# Altium PCB Inverter_Power.PcbDoc
Units mil, origin at the board's own origin, x right, y up, seen from the top; angles counter-clockwise.
Board outline 7086.61 x 5905.51 mil, 4 copper layers (Top Layer 1, Top Layer, Bottom Layer, Bottom Layer 1), stack 62.205 mil thick; 46 components, 44 nets, 337 pads, 0 vias.
Unrouted connection lines stored in the file: 185.
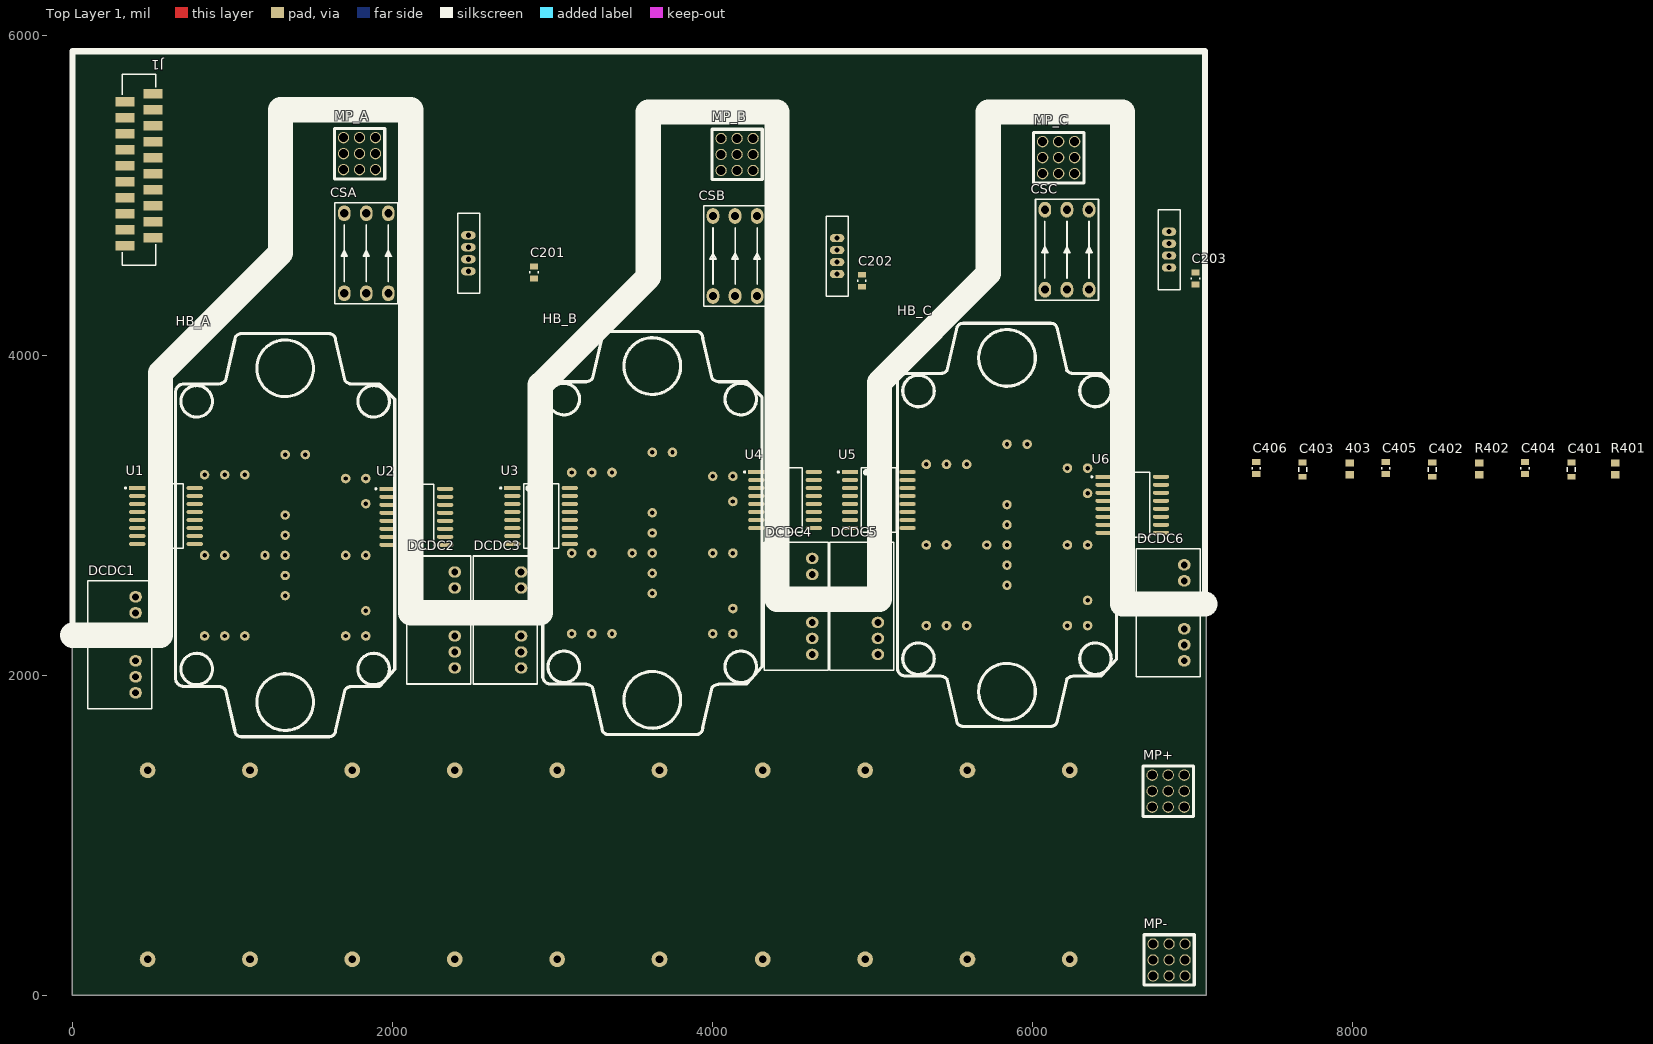
[diagram p0: Top Layer 1 view]
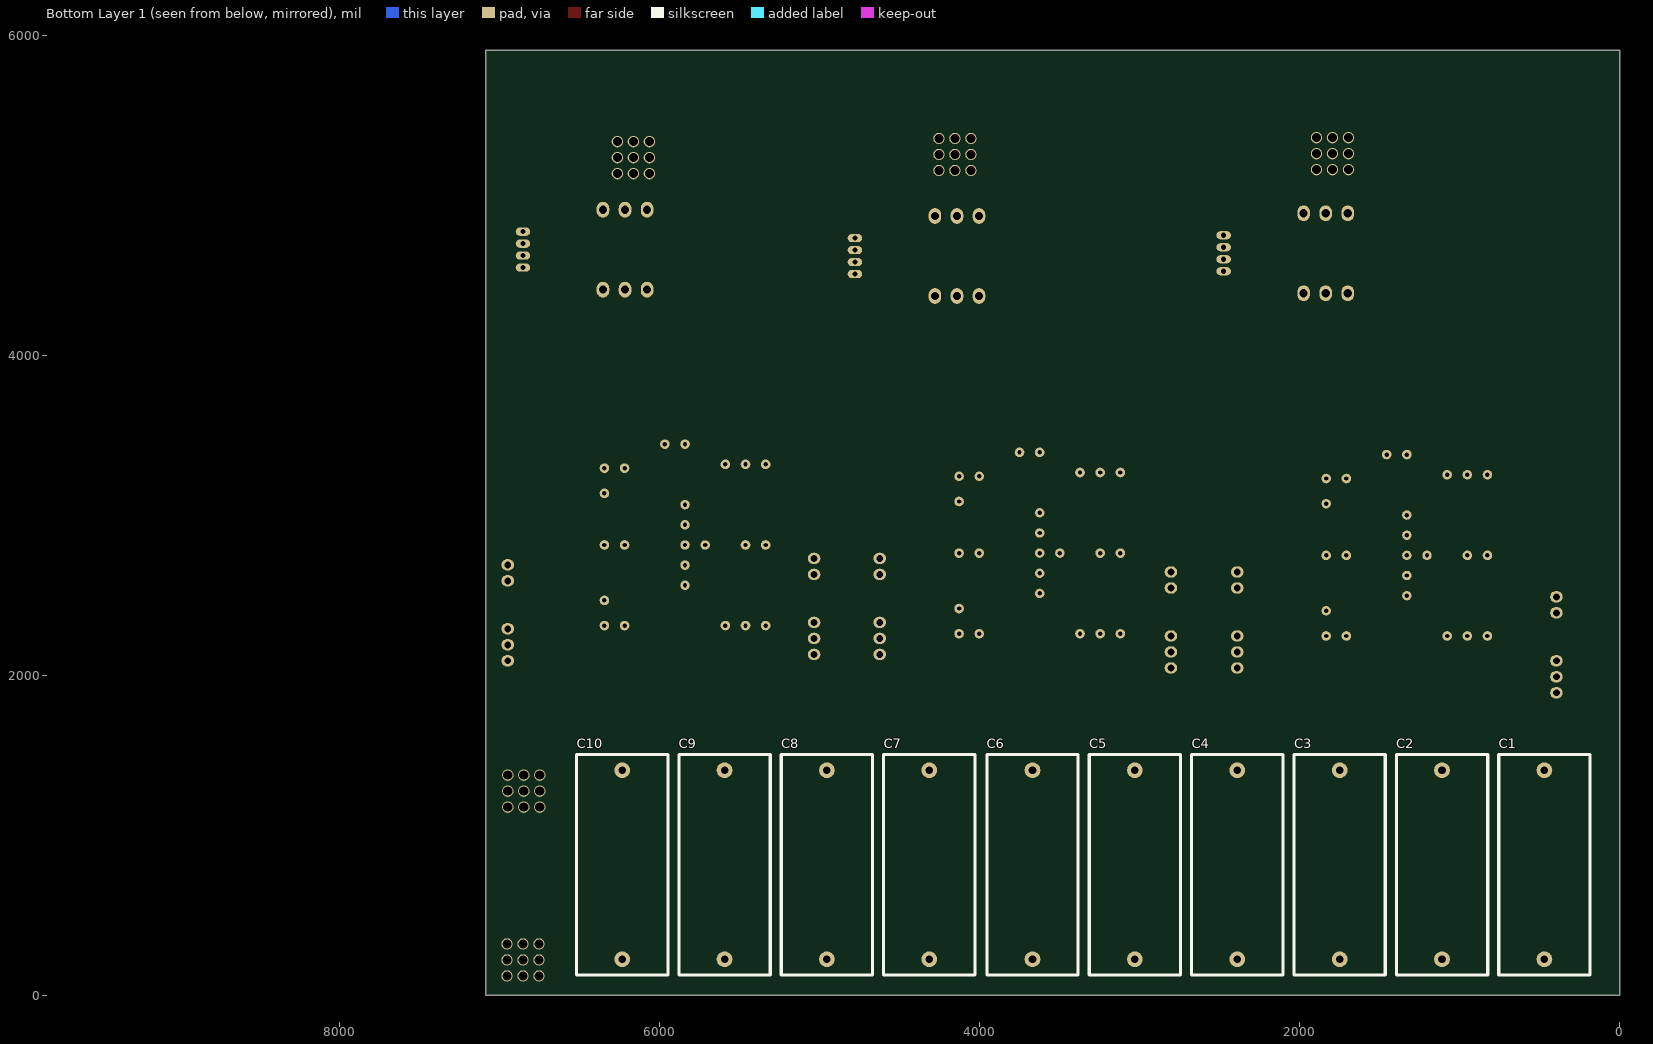
[diagram p1: Bottom Layer 1 view, seen from below]

## Layer stack, top to bottom
Top Solder: solder mask 0.3937, Solder Resist, Dk 3.5
Top Layer 1: signal copper 2.7559
Dielectric 2: prepreg 3.937, PP-006, Dk 4.1
Top Layer: signal copper 2.7559
Dielectric 1: dielectric 43.3071, FR-4, Dk 4.8
Bottom Layer: signal copper 2.7559
Dielectric 3: prepreg 3.937, PP-006, Dk 4.1
Bottom Layer 1: signal copper 2.7559
Bottom Solder: solder mask 0.3937, Solder Resist, Dk 3.5

## Board outline
0,0 0,5905.51 7086.61,5905.51 7086.61,0

## Design rules (kind name [scope] priority, off if disabled: settings)
Clearance [All] p1: gap=7.87 ignorepadtopadclearanceinfootprint=FALSE
Height [All] p1: minheight=0 maxheight=1968.5 prefheight=500
PolygonConnect [All] p1: connectstyle=Relief reliefconductorwidth=10 reliefentries=4 polygonreliefangle="90 Angle" airgapwidth=10
RoutingVias [All] p1: holewidth=28 width=50 viastyle="Through Hole" minholewidth=28 minwidth=50 maxholewidth=28 maxwidth=50
SolderMaskExpansion [All] p1: expansion=4 istentingtop=FALSE
Width [All] p1: maxlimit=10 minlimit=10 preferedwidth=10
29 further rules are at their usual default settings.

## Classes and differential pairs
component class Temp_Sense: 403 C401 C402 C403 C404 C405 C406 R401 R402 U401 U402 U403
component class Gate_Drivers: DCDC1 DCDC2 DCDC3 DCDC4 DCDC5 DCDC6 U1 U2 U3 U4 U5 U6
component class Inverter_Power: J1 MP+ MP- MP_A MP_B MP_C
component class Current_Sense: C201 C202 C203 CSA CSB CSC
component class Power_Stage: C1 C2 C3 C4 C5 C6 C7 C8 C9 C10 HB_A HB_B HB_C

## Components (designator, comment, footprint, x,y, rotation, side; value= is the part's Value field where it differs from the comment)
403 "CR0805-FX-4700GLF" R0805FTK 7985,3289.72 r90 top
C1 "10uF 850V" FHA85Y106KS 470,815 r90 bottom
C2 "10uF 850V" FHA85Y106KS 1110,815 r90 bottom
C3 "10uF 850V" FHA85Y106KS 1750,815 r90 bottom
C4 "10uF 850V" FHA85Y106KS 2390,815 r90 bottom
C5 "10uF 850V" FHA85Y106KS 3030,815 r90 bottom
C6 "10uF 850V" FHA85Y106KS 3670,815 r90 bottom
C7 "10uF 850V" FHA85Y106KS 4315,815 r90 bottom
C8 "10uF 850V" FHA85Y106KS 4955,815 r90 bottom
C9 "10uF 850V" FHA85Y106KS 5595,815 r90 bottom
C10 "10uF 850V" FHA85Y106KS 6235,815 r90 bottom
C201 "885012207098" C0805FNPC-R 2885,4517.6 r270 top
C202 "885012207098" C0805FNPC-R 4935,4465 r270 top
C203 "885012207098" C0805FNPC-R 7020,4480 r270 top
C401 "885012208058" C0805FNPC-W 9370,3284.72 r90 top
C402 "885012208058" C0805FNPC-W 8500,3284.72 r90 top
C403 "885012208058" C0805FNPC-W 7690,3284.72 r90 top
C404 "885012207103" C0805FNPC-R 9080,3294.72 r90 top
C405 "885012207103" C0805FNPC-R 8210,3294.72 r90 top
C406 "885012207103" C0805FNPC-R 7400,3294.72 r90 top
CSA "LEM CKSR 50-NP" "CKSR 50-NP" 1975,4637.52 r180 top
CSB "LEM CKSR 50-NP" "CKSR 50-NP" 4280,4620 r180 top
CSC "LEM CKSR 50-NP" "CKSR 50-NP" 6355,4660 r180 top
DCDC1 "MGJ6-series" MGJ2D051802BSC 395,2490 r270 top
DCDC2 "MGJ6-series" MGJ2D051802BSC 2390,2645 r270 top
DCDC3 "MGJ6-series" MGJ2D051802BSC 2805,2645 r270 top
DCDC4 "MGJ6-series" MGJ2D051802BSC 4625,2730 r270 top
DCDC5 "MGJ6-series" MGJ2D051802BSC 5035,2730 r270 top
DCDC6 "MGJ6-series" MGJ2D051802BSC 6950,2690 r270 top
HB_A "DFS05HF12EYR1" DFS05HF12EYR1 1330,2875 r270 top
HB_B "DFS05HF12EYR1" DFS05HF12EYR1 3625,2889.02 r270 top
HB_C "DFS05HF12EYR1" DFS05HF12EYR1 5841.97,2939.92 r270 top
J1 "690367292076" 690367292076 416.42,5160 r90 top
MP+ "M4 x 6mm" 7461096_HAL 6850,1275 r0 top
MP- "M4 x 6mm" 7461096_HAL 6855,220 r0 top
MP_A "M4 x 6mm" 7461096_HAL 1795,5260 r0 top
MP_B "M4 x 6mm" 7461096_HAL 4155,5255 r0 top
MP_C "M4 x 6mm" 7461096_HAL 6165,5235 r0 top
R401 "CR0805-FX-4700GLF" R0805FTK 9645,3289.72 r90 top
R402 "CR0805-FX-4700GLF" R0805FTK 8795,3289.72 r90 top
U1 "UCC21710" FP-DW0016B-IPC_A 585,2995 r0 top
U2 "UCC21710" FP-DW0016B-IPC_A 2150,2990 r0 top
U3 "UCC21710" FP-DW0016B-IPC_A 2930,2995 r0 top
U4 "UCC21710" FP-DW0016B-IPC_A 4455,3095 r0 top
U5 "UCC21710" FP-DW0016B-IPC_A 5040.26,3095 r0 top
U6 "UCC21710" FP-DW0016B-IPC_A 6625.26,3065 r0 top

## Footprints (in the part's own frame and the unit in brackets; to place one, negate y for a bottom-side part, rotate by r counter-clockwise, add the part's x,y. Pads: shape width x height; smd on the part's side, far side on the other; paste and mask are expansions set on the pad)
7461096_HAL [mm] "M4, thread 6mm"
  round 1.8 hole 1.45: 1(-2.54,-2.54) 1(-2.54,0) 1(-2.54,2.54) 1(0,-2.54) 1(0,0) 1(0,2.54) 1(2.54,-2.54) 1(2.54,0) 1(2.54,2.54)
  silkscreen extent -4,-4 4,4, body extent -3.5,-3.5 3.5,3.5, height 9
690367292076 [mm] "MiniModule Connectors, PCB Type, Female, SMT, Vertical, 20p"
  rect 1.5x3 smd: 1(12.065,-2.25) 2(10.795,2.25) 3(9.525,-2.25) 4(8.255,2.25) 5(6.985,-2.25) 6(5.715,2.25) 7(4.445,-2.25) 8(3.175,2.25) 9(1.905,-2.25) 10(0.635,2.25) 11(-0.635,-2.25) 12(-1.905,2.25) 13(-3.175,-2.25) 14(-4.445,2.25) 15(-5.715,-2.25) 16(-6.985,2.25) 17(-8.255,-2.25) 18(-9.525,2.25) 19(-10.795,-2.25) 20(-12.065,2.25)
  silkscreen extent -15.15,-2.65 15.15,2.65, body extent -15,-3.5 15,3.5, height 5.75
C0805FNPC-R [mm]
  rect 0.9x1.3 smd: 1(-0.95,0) 2(0.95,0)
  silkscreen extent -0.15,-0.65 0.15,0.65, body extent -1.03,-0.63 0.97,0.63, height 0.96
C0805FNPC-W [mm]
  rect 0.9x1.3 smd: 1(-1.15,0) 2(1.15,0)
  silkscreen extent -0.35,-0.65 0.35,0.65, body extent -1,-0.63 1,0.63, height 0.96
"CKSR 50-NP" [mm]
  oval 2x2.5 hole 1.3: 3(0,6.35) 4(3.5,6.35) 5(7,6.35) 6(7,-6.35) 7(3.5,-6.35) 8(0,-6.35)
  oval 2.3x1.3 hole 0.8: 11(-12.7,-2.857) 12(-12.7,-0.952) 13(-12.7,0.952) 14(-12.7,2.857)
  silkscreen extent -14.5,-8 8.5,8, body extent -15,-6.5 9.5,6.5, height 16
DFS05HF12EYR1 [mm] "1200V/5.5mO Half Bridge SiC MOSFET Module"
  round 1.524 hole 0.7: 1(-9,12.8) 1(-9,9.6) 1(-5,12.8) 1(12,12.8) 1(16,9.6) 1(16,12.8) 2(3.2,12.8) 3(3.2,9.6) 4(-9.6,-9.6) 4(-9.6,-6.4) 4(-9.6,-12.8) 4(16,-6.4) 4(16,-12.8) 4(16,-9.6) 6(3.2,-9.6) 7(3.2,-12.8) 8(-12.8,0) 9(-12.8,3.2)
  round 1.5 hole 0.7: 5(-3.2,0) 5(0,0) 5(3.2,0) 5(3.2,-3.2) 5(6.4,0) 5(9.6,0)
  silkscreen extent -32,-17.4 32,17.4, body extent -24,-17.5 24,17.5
FHA85Y106KS [mm] "850V 10uF High Temperature Film Capacitor for Automotive Application"
  round 2.5 hole 1.2: 1(-15,0) 2(15,0)
  silkscreen extent -17.5,-7.25 17.5,7.25, body extent -16.5,-7.25 16.5,7.25, height 37
FP-DW0016B-IPC_A [mil]
  rect 102.47x24.49 smd paste+0 mask+0: 1(-179.74,175)
  rrect100% 102.47x24.49 smd paste+0 mask+0: 2(-179.74,125) 3(-179.74,75) 4(-179.74,25) 5(-179.74,-25) 6(-179.74,-75) 7(-179.74,-125) 8(-179.74,-175) 9(179.74,-175) 10(179.74,-125) 11(179.74,-75) 12(179.74,-25) 13(179.74,25) 14(179.74,75) 15(179.74,125) 16(179.74,175)
  silkscreen extent -258,-203 109,203, body extent -251,-222 251,222, height 10
MGJ2D051802BSC [mm]
  oval 1.8x2 hole 1.1: 1(0,0) 2(2.54,0) 5(10.16,0) 6(12.7,0) 7(15.24,0)
  silkscreen extent -2.54,-7.62 17.78,2.54, body extent -2.25,-7.5 17.25,2.32, height 12.6
R0805FTK [mm] "Chip Resistor, 2-Leads, Body 2,00x1,25mm, IPC Medium Density"
  rect 1.15x1.35 smd: 1(-0.925,0) 2(0.925,0)
  body extent -1,-0.63 1,0.63, height 0.65

## Part data
403 R401 R402: library part R470-0805FTK, "Res Thick Film 0805 470 Ohm 1% 1/8W ±100ppm/°C Molded SMD SMD Paper Tape on Plastic Reel", Case Code (Imperial)=0805, Case Code (Metric)=2012, Manufacturer 1=Bourns, Max Operating Temperature=155°C, Max Power Dissipation=125mW, Min Operating Temperature=-55°C, Resistance=470R, Resistance Tolerance=1%, Resistor Type="Thick Film", Temperature Coefficient=100ppm/°C, Voltage Rating=150V, .Creator=DR, Case/Package=0805, Category="Chip SMD Resistors", ComponentLink1Description=https://datasheet.ciiva.com/11808/0900766b80fcdb72-11808686.pdf?src-supplier=RSComponents, ComponentLink1URL=https://datasheet.ciiva.com/11808/0900766b80fcdb72-11808686.pdf?src-supplier=RSComponents, ComponentLink2Description=https://datasheet.ciiva.com/7985/1856384-7985880.pdf?src-supplier=Element14, ComponentLink2URL=https://datasheet.ciiva.com/7985/1856384-7985880.pdf?src-supplier=Element14, ComponentLink3Description=https://datasheet.ciiva.com/22693/1902866-22693247.pdf?src-supplier=Element14, ComponentLink3URL=https://datasheet.ciiva.com/22693/1902866-22693247.pdf?src-supplier=Element14, ComponentLink4Description=https://datasheet.ciiva.com/5541/chpreztr-5541930.pdf?src-supplier=Mouser, ComponentLink4URL=https://datasheet.ciiva.com/5541/chpreztr-5541930.pdf?src-supplier=Mouser, Construction=Rectangular, Contact Plating=Tin, Depth=1.25mm, Features="Moisture Resistant", Height=0.5mm, Length=2mm, Manufacturer Part Number 1=CR0805-FX-4700GLF, Military Standard=Not, Mount="Surface Mount", Number of Pins=2, Number of Terminations=2, Packaging="Tape and Reel", Power Rating=125mW, Pricing 1="1=0,00990, 10=0,00980, 25=0,00950, 50=0,00940, 100=0,00930, 250=0,00920, 500=0,00910, 1000=0,00890, 3000=0,00870, 6000=0,00860 (USD)", Radiation Hardening=No, REACH SVHC="No SVHC", RoHS=Yes, Series=CR0805, Stock 1=12623, Supplier 1="Arrow Electronics", Supplier Part Number 1=CR0805-FX-4700GLF, Technology="THICK FILM", Termination=SMD/SMT, Thickness=508um, TOLERANCE=1%, Voltage Rating (DC)=150V
C1 C2 C3 C4 C5 C6 C7 C8 C9 C10: library part FHA85Y106KS, "High Temperature Film Capacitor for Automotive Application"
C201 C202 C203: library part C100n-50V-0805FNPC-X7R, "Cap, 0.1ΜF, 50V, 10%, X7R, 0805", Capacitance=100nF, Case Code (Imperial)=0805, Case Code (Metric)=2012, Dielectric=X7R, Manufacturer 1="Wurth Electronics", Max Operating Temperature=125°C, Min Operating Temperature=-55°C, Supplier Part Number 1=1813493, TOLERANCE=10%, Voltage Rating=50V, .Creator=DR, Case/Package=0805, Category="Ceramic Capacitors", ComponentLink1Description=http://www.farnell.com/datasheets/1958498.pdf?src-supplier=Farnell, ComponentLink1URL=http://www.farnell.com/datasheets/1958498.pdf?src-supplier=Farnell, ComponentLink2Description=http://www.farnell.com/datasheets/1958498.pdf?src-supplier=Element14, ComponentLink2URL=http://www.farnell.com/datasheets/1958498.pdf?src-supplier=Element14, ComponentLink3Description=https://katalog.we-online.de/pbs/datasheet/885012207098.pdf?src-supplier=Digi-Key, ComponentLink3URL=https://katalog.we-online.de/pbs/datasheet/885012207098.pdf?src-supplier=Digi-Key, ComponentLink4Description=http://www.farnell.com/datasheets/1958498.pdf?src-supplier=Newark, ComponentLink4URL=http://www.farnell.com/datasheets/1958498.pdf?src-supplier=Newark, Length=0.079inch, Manufacturer Part Number 1=885012207098, Mount="Surface Mount", Packaging="Cut Tape", Pricing 1="100=0,10200, 500=0,07100, 2000=0,06100 (GBP)", REACH SVHC=Unknown, RoHS=Yes, RoHS Compliant=Yes, Stock 1=8000, Supplier 1=RSComponents, Thickness=0.035inch, Voltage Rating (DC)=50V, Width=0.049inch
C401 C402 C403: library part C0.22u-0805FNPC-X5R, "Cap Ceramic 0.22uF 50V X5R 10% Pad SMD 0805 85C Low ESR Automotive T/R", Capacitance=220nF, Case Code (Imperial)=0805, Case Code (Metric)=2012, Dielectric=X5R, Manufacturer="Taiyo Yuden", Manufacturer Part Number=UMK212BJ224KGHT, Max Operating Temperature=85°C, Min Operating Temperature=-55°C, Package Quantity=3000, Ratings=AEC-Q200, Supplier Part Number 1=587-3514-1-ND, TOLERANCE=10%, Voltage Rating=50V, .Creator=DR, Case/Package=0805, Category=Capacitor, ComponentLink1Description=Datasheet, ComponentLink1URL=https://eu.mouser.com/datasheet/2/396/taiyo_yuden_12132018_mlcc11_hq_e-1510082.pdf, ComponentLink2Description="Where buy it", ComponentLink2URL=https://eu.mouser.com/ProductDetail/Taiyo-Yuden/UMK212BJ224KGHT?qs=CNQs48zzdnpf%2FbZJTfp33Q%3D%3D, Halogen Free="Halogen Free", Height=1.25mm, Lead Free="Lead Free", Length=0.079inch, Mount="Surface Mount", Packaging="Tape and Reel", Pricing 1="1=0,20000, 10=0,13700, 50=0,08220, 100=0,06950, 500=0,04754, 1000=0,04206 (USD)", RoHS=Yes, RoHS Compliant=Yes, Stock 1=900, Supplier 1=Digi-Key, Termination=SMD/SMT, Thickness=0.053inch, Voltage Rating (DC)=50V, Width=0.049inch
C404 C405 C406: library part C1u-50V-0805FNPC-X7R, "Multilayer Ceramic Capacitor, Wcap-Csgp Series, 1 F, 10%, X7R, 50 V, 0805 [2012 Metric] Rohs Compliant: Yes", Capacitance=1uF, Case Code (Imperial)=0805, Case Code (Metric)=2012, Dielectric=X7R, Manufacturer 1="Wurth Electronics", Max Operating Temperature=85°C, Min Operating Temperature=-55°C, Supplier Part Number 1=1813523, TOLERANCE=10%, Voltage Rating=50V, .Creator=GP, Case/Package=0805, Category="Ceramic Capacitors", ComponentLink1Description=http://www.farnell.com/datasheets/1958501.pdf?src-supplier=Farnell, ComponentLink1URL=http://www.farnell.com/datasheets/1958501.pdf?src-supplier=Farnell, ComponentLink2Description=http://www.farnell.com/datasheets/1958501.pdf?src-supplier=Element14, ComponentLink2URL=http://www.farnell.com/datasheets/1958501.pdf?src-supplier=Element14, ComponentLink3Description=https://katalog.we-online.de/pbs/datasheet/885012107003.pdf?src-supplier=Digi-Key, ComponentLink3URL=https://katalog.we-online.de/pbs/datasheet/885012107003.pdf?src-supplier=Digi-Key, ComponentLink4Description=http://www.farnell.com/datasheets/1958501.pdf?src-supplier=Newark, ComponentLink4URL=http://www.farnell.com/datasheets/1958501.pdf?src-supplier=Newark, Length=0.079inch, Manufacturer Part Number 1=885012207103, Mount="Surface Mount", Packaging="Cut Tape", Pricing 1="50=0,27200, 250=0,25300, 500=0,22800, 1250=0,20100, 2500=0,17100 (GBP)", REACH SVHC=Unknown, RoHS=Yes, RoHS Compliant=Yes, Stock 1=5100, Supplier 1=RSComponents, Thickness=0.053inch, Voltage Rating (DC)=50V, Width=0.049inch
CSA CSB CSC: library part "CKSR 50-NP", "Sensor Current Flux 50A AC/DC", Manufacturer 1=LEM, Manufacturer Part Number 1=CKSR50-NP, Supplier Part Number 1=6668214, Category="Current Sensors", ComponentLink1Description=https://datasheet.ciiva.com/2812/cksrseries-2812726.pdf?src-supplier=Digi-Key, ComponentLink1URL=https://datasheet.ciiva.com/2812/cksrseries-2812726.pdf?src-supplier=Digi-Key, ComponentLink2Description=https://datasheet.ciiva.com/7992/1639868-7992216.pdf?src-supplier=Element14, ComponentLink2URL=https://datasheet.ciiva.com/7992/1639868-7992216.pdf?src-supplier=Element14, Pricing 1="1=15,8, 5=15,33, 10=14,65 (EUR)", RoHS=Yes, Stock 1=84, Supplier 1=Rs
DCDC1 DCDC2 DCDC3 DCDC4 DCDC5 DCDC6: library part MGJ2D051802BSC, "Isolated DC/DC Converters - Through Hole DC/DC 2W TH 5-18/2V 5.4KV SIP", Manufacturer 1=Murata, Category="Board Mount Modules", Manufacturer Part Number 1=MGJ2D051802BSC, Pricing 1="25=5,1192, 30=4,9896, 60=4,86, 130=4,7304, 250=4,6008, 1300=4,4712, 2500=4,3416 (USD)", RoHS=No, Stock 1=25, Supplier 1=Avnet, Supplier Part Number 1=MGJ2D051802BSC
HB_A HB_B HB_C: "1200V/5.5mΩ Half Bridge SiC MOSFET Module", Blocking voltage="1200 V", Isolation Voltage="3.4 kV", Maximum junction temperature="175 °C", NTC B-value @50 ºC="3375 K", NTC resistance @25 ºC="5 kOhm", ComponentLink1Description=Datasheet, ComponentLink1URL=https://www.leapers-power.com/action/download?file=/web/uploads/file/20230309/E66B0Y1w3x716fyKzgl84X9Kg38sCV40.pdf, Maximum IDS-ISD="150 A", Maximum VGSS="+21 V / -2 V", QG="520 nC", Rds(on)="5.5 mOhm .. 13 mOhm", RGint="1.9 Ohm", Rth(j-c)="0.12 K/W", Vf_diode="3.3 V .. 4.0 V", VGS(th)="2.8 V .. 4.8 V"
J1: library part J_Flat20, "6903 Series 1.27mm; 2.54mm Pitch 20 Way2 Row Straight PCB Socket; Surface Mount", Manufacturer 1="Wurth Electronics", Supplier Part Number 1=7718102, Category=Connectors, ComponentLink1Description=https://datasheet.ciiva.com/25617/0900766b811917f0-25617511.pdf?src-supplier=Rs, ComponentLink1URL=https://datasheet.ciiva.com/25617/0900766b811917f0-25617511.pdf?src-supplier=Rs, ComponentLink2Description=https://datasheet.ciiva.com/29130/69036729xx76-29130464.pdf?src-supplier=Digi-Key, ComponentLink2URL=https://datasheet.ciiva.com/29130/69036729xx76-29130464.pdf?src-supplier=Digi-Key, Manufacturer Part Number 1=690367292076, Pricing 1="5=2,326, 50=2,162, 250=2, 500=1,742, 1000=1,582 (EUR)", RoHS=Yes, Stock 1=2285, Supplier 1=Rs
MP+ MP- MP_A MP_B MP_C: library part 7461096, "WP-SHFU REDCUBE PRESS-FIT with external thread, L7W7H9mm, M4 x 6mm, 130A", Manufacturer="Wurth Elektronik", Operating Temperature Max=150°C, Operating Temperature Min=-55°C, Rated Current=130A, Category="REDCUBE PRESS-FIT", ComponentLink1Description="Website Link", ComponentLink1URL=https://www.we-online.com/redexpert/article/7461096?ad, ComponentLink2Description="Datasheet Link", ComponentLink2URL=https://www.we-online.com/redexpert/spec/7461096?ad, Height=9mm, Length=7mm, Manufacturer Part Number=7461096, Match Code=WP-SHFU, Material=Brass, Mount="Press Fit", Number of Pins=9, Packaging=Bulk, Surface=Tin, Thread Length=6mm, Thread Size=M4, Width=7mm
U1 U2 U3 U4 U5 U6: "Automotive ±10-A 5.7kV RMS single channel isolated gate driver for SiC/IGBT 16-SOIC -40 to 125", Manufacturer 1="Texas Instruments", Manufacturer Part Number 1=UCC21710QDWQ1, Supplier Part Number 1=595-UCC21710QDWQ1, Category="Gate Drivers", ComponentLink1Description=http://www.ti.com/general/docs/suppproductinfo.tsp?distId=10&amp;gotoUrl=http%3A%2F%2Fwww.ti.com%2Flit%2Fgpn%2Fucc21710-q1&src-supplier=Digi-Key, ComponentLink1URL=http://www.ti.com/general/docs/suppproductinfo.tsp?distId=10&amp;gotoUrl=http%3A%2F%2Fwww.ti.com%2Flit%2Fgpn%2Fucc21710-q1&src-supplier=Digi-Key, Pricing 1="1=9,15, 10=8,27, 50=7,89, 100=7,89, 1000=5,3, 10000=5,3 (USD)", RoHS=Yes, Stock 1=3113, Supplier 1=Mouser

## Nets (pads, with @x,y where several pads share a name; then routed paths per layer and width w, separated by ;. In a path a pad name is that pad's centre, name@x,y a point inside that pad or via, vN(x,y) a via of type N, cw(c..) or ccw(c..) an arc to the next point about the centre after c; other vN are vias at no path point)
+5: C201.2 C202.2 C203.2 CSA.14 CSB.14 CSC.14 J1.17
A: CSA.3 CSA.4 CSA.5 HB_A.1
A_OUT: CSA.6 CSA.7 CSA.8 MP_A.1
B: CSB.3 CSB.4 CSB.5 HB_B.1
B_OUT: CSB.6 CSB.7 CSB.8 MP_B.1
C: CSC.3 CSC.4 CSC.5 HB_C.1
C_OUT: CSC.6 CSC.7 CSC.8 MP_C.1
ENABLE: J1.6
G1: HB_A.6
G2: HB_A.3
G3: HB_B.6
G4: HB_B.3
G5: HB_C.6
G6: HB_C.3
GND: C201.1 C202.1 C203.1 CSA.13 CSB.13 CSC.13 DCDC1.2 DCDC2.2 DCDC3.2 DCDC4.2 DCDC5.2 DCDC6.2 J1.1 J1.2 J1.19 J1.20 U1.9 U2.9 U3.9 U4.9 U5.9 U6.9
GND_NTC: C401.1 C402.1 C403.1 C404.1 C405.1 C406.1 HB_A.8 HB_B.8 HB_C.8
I_A: CSA.12 J1.7
I_B: CSB.12 J1.8
I_C: CSC.12 J1.9
LV+in: DCDC1.1 DCDC2.1 DCDC3.1 DCDC4.1 DCDC5.1 DCDC6.1 J1.18
NetC401_2: C401.2
NetC402_2: C402.2
NetC403_2: C403.2
NTC1: C404.2 HB_A.9 R401.1
NTC2: C405.2 HB_B.9 R402.1
NTC3: 403.1 C406.2 HB_C.9
PWM1: J1.10 U1.10
PWM2: J1.11 U2.10
PWM3: J1.12 U3.10
PWM4: J1.13 U4.10
PWM5: J1.14 U5.10
PWM6: J1.15 U6.10
S1: HB_A.7
S2: HB_A.2
S3: HB_B.7
S4: HB_B.2
S5: HB_C.7
S6: HB_C.2
T_A: J1.3
T_B: J1.4
T_C: J1.5
TRIP: J1.16
TS+: C1.2 C2.2 C3.2 C4.2 C5.2 C6.2 C7.2 C8.2 C9.2 C10.2 HB_A.4 HB_B.4 HB_C.4 MP+.1
TS-: C1.1 C2.1 C3.1 C4.1 C5.1 C6.1 C7.1 C8.1 C9.1 C10.1 HB_A.5 HB_B.5 HB_C.5 MP-.1
pads on no net: 403.2 CSA.11 CSB.11 CSC.11 DCDC1.5 DCDC1.6 DCDC1.7 DCDC2.5 DCDC2.6 DCDC2.7 DCDC3.5 DCDC3.6 DCDC3.7 DCDC4.5 DCDC4.6 DCDC4.7 DCDC5.5 DCDC5.6 DCDC5.7 DCDC6.5 DCDC6.6 DCDC6.7 R401.2 R402.2 U1.1 U1.2 U1.3 U1.4 U1.5 U1.6 U1.7 U1.8 U1.11 U1.12 U1.13 U1.14 U1.15 U1.16 U2.1 U2.2 U2.3 U2.4 U2.5 U2.6 U2.7 U2.8 U2.11 U2.12 U2.13 U2.14 U2.15 U2.16 U3.1 U3.2 U3.3 U3.4 U3.5 U3.6 U3.7 U3.8 U3.11 U3.12 U3.13 U3.14 U3.15 U3.16 U4.1 U4.2 U4.3 U4.4 U4.5 U4.6 U4.7 U4.8 U4.11 U4.12 U4.13 U4.14 U4.15 U4.16 U5.1 U5.2 U5.3 U5.4 U5.5 U5.6 U5.7 U5.8 U5.11 U5.12 U5.13 U5.14 U5.15 U5.16 U6.1 U6.2 U6.3 U6.4 U6.5 U6.6 U6.7 U6.8 U6.11 U6.12 U6.13 U6.14 U6.15 U6.16

## Silkscreen, mask and mechanical layers (free items; w line width, h text height)
Top Overlay:
  lines w39.37: 0,2250 0,5900 ; 5,5900 7080,5900 7080,2445
  lines w157.48: 0,2250 550,2250 550,3890 1300,4640 1300,5535 2115,5535 2115,2390 2925,2390 2925,3815 3600,4490 3600,5520 4405,5520 4405,2475 5045,2475 5045,3830 5725,4510 5725,5520 6565,5520 6565,2445 7080,2445